# EAGLE board RPi_RN2483 (EAGLE 7.6.0)
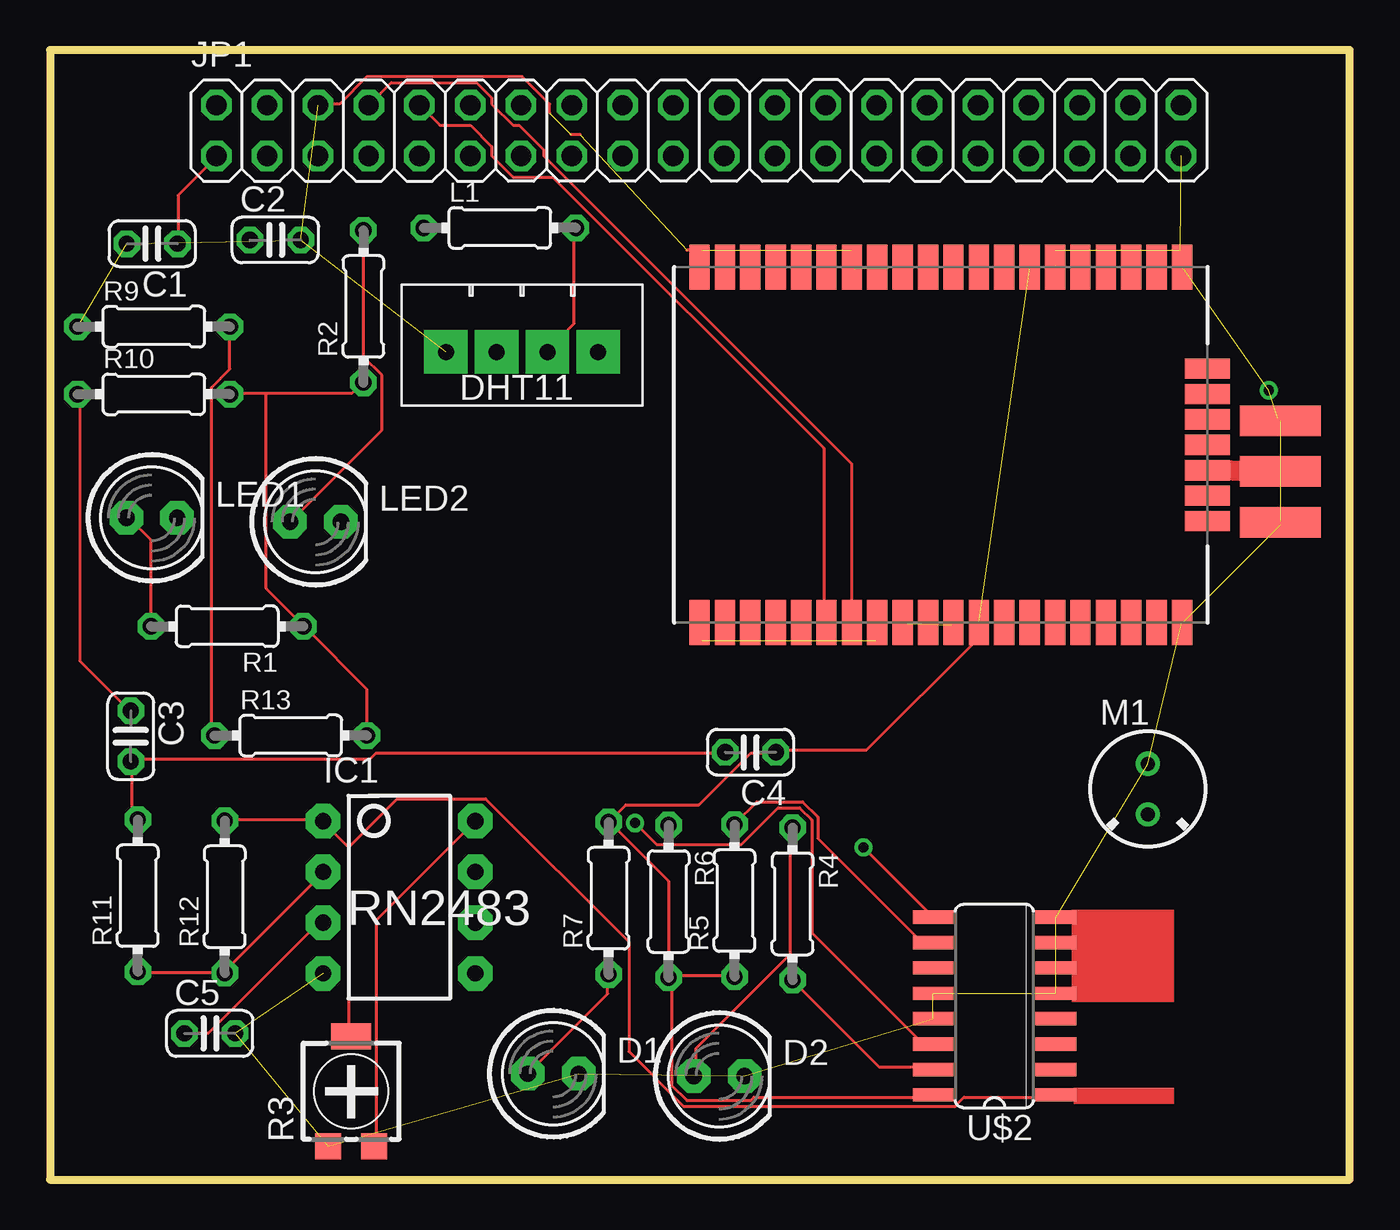
[diagram p0: board, top side]
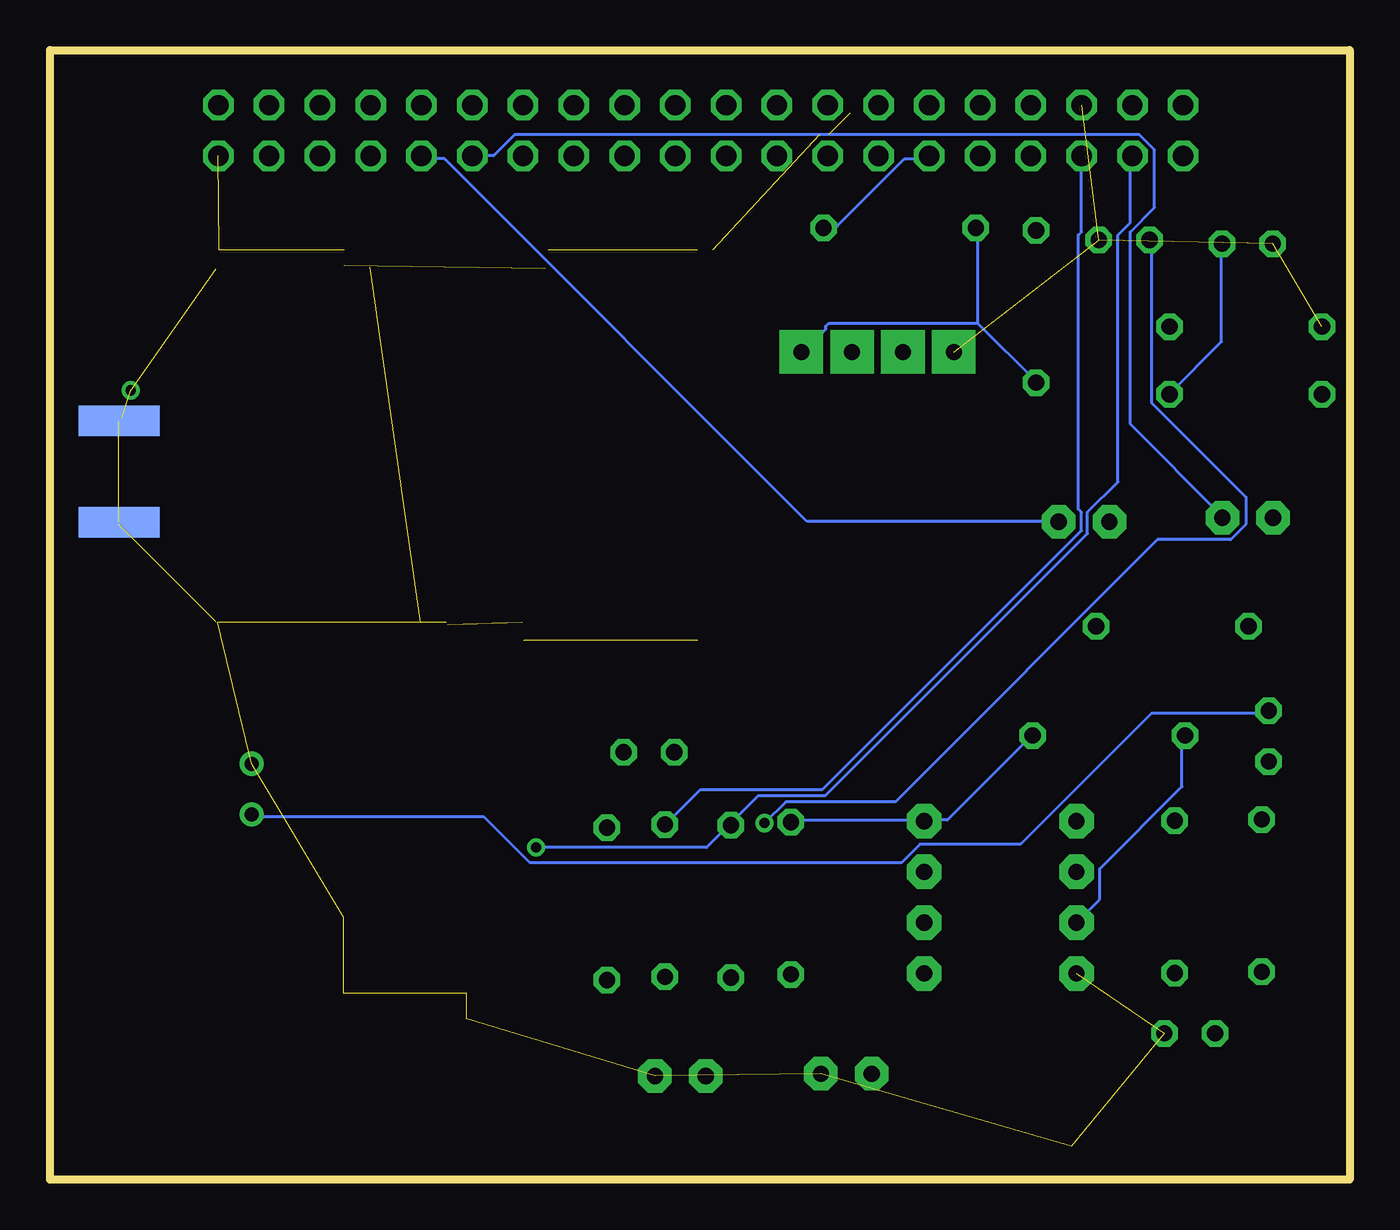
[diagram p1: board, bottom side, seen from below]

Size 65 x 56.5 mm. Coordinates in mm from the lower left corner, seen from the top.
Outline: 0,0 65,0 65,56.5 0,56.5 0,0
Copper layers (1*16): Top 0.035mm / dielectric 1.5mm / Bottom 0.035mm
Design rules "Ragworm": minimum track width 6mil, minimum drill 20mil, track to track 6mil, track to pad 6mil, pad to pad 6mil, via to via 6mil, smd to smd 6mil, copper to edge 20mil, drill to drill 8mil, minimum pad ring 10mil, minimum via ring 8mil, stop-mask expansion 4mil, vias tented up to drill 0mil, thermal gap 10mil

## Footprints (pad centres in the part's own frame; a part is rotated, then mirrored left to right if it is on the bottom)
C025-024X044 = drill 0.813 octagon: 1 -1.27,0; 2 1.27,0
LED5MM = drill 0.813 pad 1.676 octagon: A -1.27,0; K 1.27,0
DIP08 = drill 0.813 pad 1.727 octagon: 1 -3.81,-3.81; 2 -1.27,-3.81; 3 1.27,-3.81; 4 3.81,-3.81; 5 3.81,3.81; 6 1.27,3.81; 7 -1.27,3.81; 8 -3.81,3.81
SMA-EDGE = smd 1.524 x 4.064: GND@0 0,0; GND@1 5.08,0; SIG 2.54,0 | smd 1.524 x 4.064 bottom: GND@2 0,0; GND@3 5.08,0
2X20 = drill 1.016 octagon: 1 -24.13,-1.27; 2 -24.13,1.27; 3 -21.59,-1.27; 4 -21.59,1.27; 5 -19.05,-1.27; 6 -19.05,1.27; 7 -16.51,-1.27; 8 -16.51,1.27; 9 -13.97,-1.27; 10 -13.97,1.27; 11 -11.43,-1.27; 12 -11.43,1.27; 13 -8.89,-1.27; 14 -8.89,1.27; 15 -6.35,-1.27; 16 -6.35,1.27; 17 -3.81,-1.27; 18 -3.81,1.27; 19 -1.27,-1.27; 20 -1.27,1.27; 21 1.27,-1.27; 22 1.27,1.27; 23 3.81,-1.27; 24 3.81,1.27; 25 6.35,-1.27; 26 6.35,1.27; 27 8.89,-1.27; 28 8.89,1.27; 29 11.43,-1.27; 30 11.43,1.27; 31 13.97,-1.27; 32 13.97,1.27; 33 16.51,-1.27; 34 16.51,1.27; 35 19.05,-1.27; 36 19.05,1.27; 37 21.59,-1.27; 38 21.59,1.27; 39 24.13,-1.27; 40 24.13,1.27
0204/7 = drill 0.813 octagon: 1 -3.81,0; 2 3.81,0
F6050AP = drill 0.7 pad 1.2: 1 0,1.27; 2 0,-1.27
RTRIM4G/J = smd 1.3 x 1.3: 1 -1.15,-2.75; 3 1.15,-2.75 | smd 2 x 1.3: 2 0,2.75
RN2483 = smd 2.25 x 1.016: GND 17.78,1.27; GND2 17.78,10.16; GND3 17.78,13.97; GND4 17.78,25.4; GND10 0,25.4; GND11 0,19.05; GND12 0,8.89; GND13 0,1.27; GPIO0 0,16.51; GPIO1 0,15.24; GPIO2 0,13.97; GPIO3 0,12.7; GPIO4 0,11.43; GPIO5 0,10.16; GPIO6 0,6.35; GPIO7 0,5.08; GPIO8 0,3.81; GPIO9 0,2.54; GPIO10 17.78,17.78; GPIO11 17.78,16.51; GPIO12 17.78,12.7; GPIO13 17.78,11.43; NC1 17.78,19.05; NC2 17.78,20.32; NC3 17.78,21.59; NC4 17.78,22.86; NC5 17.78,24.13; NC6 0,24.13; NC7 0,7.62; RESERVED1 17.78,5.08; RESERVED2 17.78,6.35; RESET 0,20.32; TEST0 0,22.86; TEST1 0,21.59; UART_CTS 17.78,3.81; UART_RTS 17.78,2.54; UART_RX 17.78,8.89; UART_TX 17.78,7.62; VDD1 17.78,15.24; VDD2 0,17.78 | smd 1.016 x 2.25: GND5 12.7,26.67; GND6 11.43,26.67; GND7 8.89,26.67; GND8 6.35,26.67; GND9 5.08,26.67; RFH 10.16,26.67; RFL 7.62,26.67
SO16 = smd 0.66 x 2.032: 1 -4.445,-3.073; 2 -3.175,-3.073; 3 -1.905,-3.073; 4 -0.635,-3.073; 5 0.635,-3.073; 6 1.905,-3.073; 7 3.175,-3.073; 8 4.445,-3.073; 9 4.445,3.073; 10 3.175,3.073; 11 1.905,3.073; 12 0.635,3.073; 13 -0.635,3.073; 14 -1.905,3.073; 15 -3.175,3.073; 16 -4.445,3.073
DHT11-PION. = drill 0.8 pad 2.184 square: DATA -1.27,0.305; GND 3.81,0.305; NO 1.27,0.305; VCC -3.81,0.305

## Placement (x,y rotation side)
C1  [C025-024X044]  5.11,46.81 180 top
C2  [C025-024X044]  11.27,47 0 top
C3  [C025-024X044]  4.04,22.18 270 top
C4  [C025-024X044]  35.04,21.37 180 top
C5  [C025-024X044]  7.99,7.31 0 top
D1  [LED5MM]  25.17,5.29 0 top
D2  [LED5MM]  33.47,5.18 0 top
IC1  LM358  [DIP08]  17.47,14.12 270 top
J$1  SMA_EDGE  [SMA-EDGE]  61.54,37.96 270 top
JP1  [2X20]  32.45,52.47 0 top
L1  [0204/7]  22.5,47.6 0 top
LED1  [LED5MM]  5.09,33.1 0 top
LED2  [LED5MM]  13.28,32.9 0 top
M1  ELECTRET_MICROPHON-F6050AP  [F6050AP]  54.91,19.53 0 top
R1  [0204/7]  8.86,27.67 180 top
R2  [0204/7]  15.68,43.67 90 top
R3  [RTRIM4G/J]  15.07,4.42 0 top
R4  [0204/7]  37.14,13.79 270 top
R5  [0204/7]  34.24,13.95 90 top
R6  [0204/7]  30.94,13.91 270 top
R7  [0204/7]  27.94,14.07 90 top
R9  [0204/7]  5.19,42.66 0 top
R10  [0204/7]  5.19,39.28 0 top
R11  [0204/7]  4.39,14.2 90 top
R12  [0204/7]  8.74,14.14 90 top
R13  [0204/7]  12.04,22.21 0 top
U$1  RN2483  [RN2483]  31.22,45.64 270 top
U$2  PCF8591T  [SO16]  47.24,8.68 90 top
U$3  DHT11-PION.  [DHT11-PION.]  23.61,41.7 180 top

## Library data of the parts
C1-C5 L1 R1-R7 R9-R13 = resistor
D1 D2 JP1 LED1 LED2 = adafruit
IC1 = SparkFun-AnalogIC; PROD_ID: IC-09172
J$1 = SparkFun-Connectors
M1 = microphon
U$1 = RN2483
U$2 = i2c
U$3 = DHT11

## Nets
+3V3: C1.1 C4.1 IC1.8 JP1.1 L1.1 R1.1 R2.1 R3.3 R5.1 R6.2 R7.2 R10.2 R13.2 U$1.VDD1 U$1.VDD2 U$2.16 U$3.VCC
GND: C1.2 C2.2 C5.2 D1.K D2.K IC1.4 J$1.GND@0 J$1.GND@1 J$1.GND@2 J$1.GND@3 JP1.6 JP1.39 M1.1 R3.1 R9.1 U$1.GND U$1.GND2 U$1.GND3 U$1.GND4 U$1.GND10 U$1.GND11 U$1.GND12 U$1.GND13 U$2.5 U$2.6 U$2.7 U$2.8 U$2.12 U$2.13 U$3.GND
GPIO5: JP1.29 LED1.K
GPIO6: JP1.31 LED2.K
N$1: LED1.A R1.2
N$2: LED2.A R2.2
N$3: U$1.GND5
N$4: U$1.GND6
N$6: U$1.GND7
N$7: U$1.RFL
N$8: U$1.GND8
N$9: U$1.GND9
N$10: JP1.11 L1.2 U$3.DATA
N$12: IC1.2 R11.1 R12.1
N$15: JP1.3 R6.1 U$2.9
N$16: JP1.5 R5.2 U$2.10
N$17: D1.A R7.1
N$18: C2.1 U$2.14
N$19: R4.2 U$2.15
N$20: D2.A R4.1
N$21: IC1.1 R3.2 R12.2 U$2.1
N$22: C3.1 M1.2 R10.1
N$23: C3.2 C4.2 R11.2
N$24: C5.1 IC1.3 R9.2 R13.1
RFH: J$1.SIG U$1.RFH
UART_RX: JP1.8 U$1.UART_RX
UART_TX: JP1.10 U$1.UART_TX

## Tracks (layer width: path | path; a pad name or v marks a point on that pad's centre or on a via)
+3V3  (1 unrouted)
  Top 0.152: C1.1 6.4,46.94 6.4,49.23 8.23,51.05 JP1.1 | 10.82,39.32 15.09,39.32 15.54,39.78 R2.1 | 10.82,39.32 9.14,39.32 R10.2 | U$2.16 44.04,4.12 35.2,4.12 35.05,3.96 31.85,3.96 31.09,4.72 31.09,10.06 R6.2 | R5.1 34.14,10.21 31.09,10.21 R6.2 | R3.3 16.31,1.68 16.31,12.95 21.18,17.83 IC1.8 | R6.2 30.94,10.21 30.94,14.94 28.04,17.83 R7.2 28.04,17.98 28.8,18.75 32.46,18.75 35.05,21.34 36.27,21.34 C4.1 36.42,21.49 40.84,21.49 46.33,26.98 46.33,27.74 U$1.VDD1 | 10.82,39.32 10.82,29.57 12.65,27.74 R1.1 12.8,27.58 15.85,24.54 15.85,22.25 R13.2
  Bottom 0.152: C1.1 6.4,46.79 6.4,41.91 8.99,39.32 R10.2 | R7.2 27.89,17.98 21.34,17.98 IC1.8 21.18,17.98 20.12,17.98 16,22.1 R13.2 | 18.59,42.82 18.59,47.55 L1.1 | 18.59,42.82 15.7,39.93 R2.1 | 18.59,42.82 26.06,42.82 26.21,42.67 26.21,42.52 27.28,41.45 U$3.VCC
GND  (via drill 0.51)  (31 unrouted)
  Top 0.152: 56.54,46.48 56.54,45.72 U$1.GND10 56.69,45.57 | 56.69,27.89 U$1.GND4 | 61.57,32.77 J$1.GND@3 61.57,32.92 62.18,32.92 | 62.18,37.95 61.57,37.95 J$1.GND@2 61.42,38.1 | 32.61,26.98 32.61,27.74 U$1.GND | U$1.GND2 41.3,27.74 41.3,26.98 U$1.GND2 | 45.11,26.98 45.11,27.74 U$1.GND3 | 32.61,46.48 32.61,45.72 U$1.GND13 32.61,46.48 | U$1.GND12 40.08,45.72 40.08,46.48 U$1.GND12 | 24.99,53.34 24.99,53.8 23.62,55.17 15.85,55.17 14.48,53.8 13.41,53.8 JP1.6 | 26.52,52.27 26.06,52.27 | 32.61,46.48 31.85,46.48 | 40.23,44.81 40.23,45.57 U$1.GND12 | 41.3,27.89 U$1.GND2 | 50.29,46.48 50.29,45.72 U$1.GND11 50.29,46.48
  Bottom 0.152: 61.57,32.92 J$1.GND@3 | 61.57,37.95 J$1.GND@2 61.42,38.1
  other vias: 60.96,39.47
GPIO5
  Bottom 0.152: JP1.29 43.74,51.21 42.82,51.21 41.76,52.27 10.52,52.27 9.75,51.51 9.75,48.62 10.97,47.4 10.97,37.8 6.4,33.22 LED1.K
GPIO6
  Bottom 0.152: JP1.31 46.33,51.05 45.26,51.05 27.13,32.92 14.63,32.92 LED2.K
N$1
  Top 0.152: R1.2 5.03,27.74 5.03,32 3.96,33.07 LED1.A
N$2
  Top 0.152: R2.2 15.7,47.4 15.7,41.15 16.61,40.23 16.61,37.49 12.04,32.92 LED2.A
N$10
  Top 0.152: L1.2 26.21,47.55 26.21,42.82 24.84,41.45 U$3.DATA
  Bottom 0.152: JP1.11 21.03,51.05 22.25,51.05 25.6,47.7 26.21,47.7 L1.2
N$12
  Top 0.152: 8.69,10.36 4.42,10.36 R11.1 | 8.69,10.36 13.56,15.24 IC1.2 | 8.69,10.36 R12.1
N$15  (via drill 0.51)
  Top 0.152: v40.69,16.61 44.04,13.26 U$2.9
  Bottom 0.152: v40.69,16.61 32.16,16.61 31.09,17.68 R6.1 30.94,17.83 29.57,19.2 26.21,19.2 13.11,32.31 13.11,33.38 11.58,34.9 11.58,47.24 10.97,47.85 10.97,51.05 JP1.3
N$16
  Top 0.152: U$2.10 44.04,11.89 43.59,11.89 38.41,17.07 38.41,18.14 37.64,18.9 35.36,18.9 34.29,17.83 R5.2
  Bottom 0.152: JP1.5 13.41,51.05 13.41,47.4 13.56,47.24 13.56,33.53 13.41,33.38 13.41,32.46 26.36,19.51 32.46,19.51 34.14,17.83 R5.2
N$17
  Top 0.152: R7.1 27.89,10.21 27.89,9.3 23.93,5.33 D1.A
N$18  (via drill 0.51)
  Top 0.152: v29.26,17.83 30.33,16.76 34.59,16.76 36.42,18.59 37.49,18.59 38.1,17.98 38.1,12.34 43.59,6.86 44.04,6.86 U$2.14
  Bottom 0.152: v29.26,17.83 28.19,18.9 22.71,18.9 9.6,32 5.94,32 5.18,32.77 5.18,34.14 9.91,38.86 9.91,46.94 C2.1
N$19
  Top 0.152: U$2.15 44.04,5.64 41.45,5.64 37.19,9.91 R4.2
N$20
  Top 0.152: R4.1 37.03,17.53 37.03,11.28 32.31,6.55 32.31,5.18 D2.A
N$21
  Top 0.152: 14.94,16.61 14.94,7.32 R3.2 | 14.94,16.61 13.72,17.83 IC1.1 13.56,17.98 8.84,17.98 R12.2 | 14.94,16.61 17.37,19.05 21.79,19.05 28.96,11.89 28.96,6.4 31.7,3.66 45.26,3.66 45.72,4.12 50.29,4.12 U$2.1
N$22
  Top 0.152: R10.1 1.52,39.17 1.52,25.91 3.96,23.47 C3.1
  Bottom 0.152: M1.2 54.86,18.14 43.28,18.14 41,15.85 22.4,15.85 21.49,16.76 16.46,16.76 9.91,23.32 4.12,23.32 C3.1
N$23
  Top 0.152: R11.2 4.27,18.14 4.12,18.29 4.12,20.88 C3.2 4.12,21.03 16,21.03 16.31,21.34 33.68,21.34 C4.2
N$24
  Top 0.152: C5.1 6.86,7.32 7.92,7.32 13.56,12.95 IC1.3 | R9.2 8.99,42.52 8.99,40.54 8.08,39.62 8.08,22.4 8.23,22.25 R13.1
  Bottom 0.152: R13.1 8.38,22.1 8.38,19.66 12.5,15.54 12.5,14.02 13.56,12.95 IC1.3
RFH
  Top 1.016: U$1.RFH J$1.SIG
UART_RX
  Top 0.152: U$1.UART_RX 40.08,27.89 40.08,35.81 24.69,51.21 24.69,51.51 23.47,52.73 23.16,52.73 22.1,53.8 22.1,54.1 21.34,54.86 17.07,54.86 16,53.8 JP1.8
UART_TX
  Top 0.152: U$1.UART_TX 38.71,27.89 38.71,36.58 25.15,50.14 23.16,50.14 22.1,51.21 22.1,51.66 21.03,52.73 19.51,52.73 18.59,53.65 JP1.10
(copper drawn outside any net)
  shapes: Top area x2

## Text on the board
tNames: RN2483